# Altium PCB 555_PCB.PcbDoc
Units mm, origin at the board's own origin, x right, y up, seen from the top; angles counter-clockwise.
Board outline 100 x 100 mm, 2 copper layers (Top Layer, Bottom Layer); 7 components, 7 nets, 20 pads, 0 vias.
Unrouted connection lines stored in the file: 9.
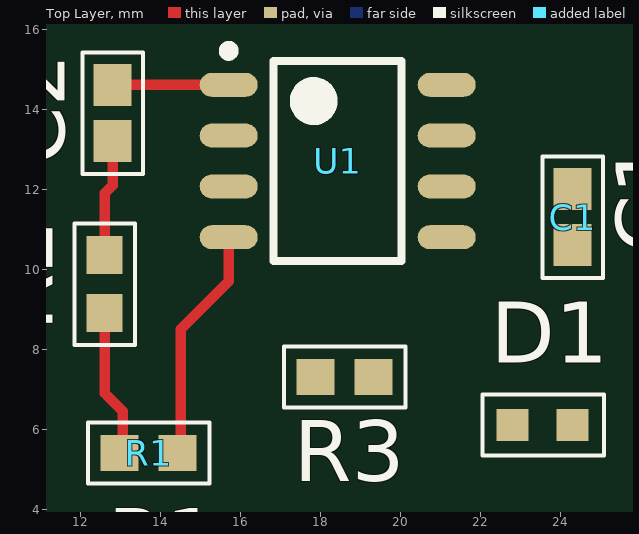
[diagram p0: Top Layer view]
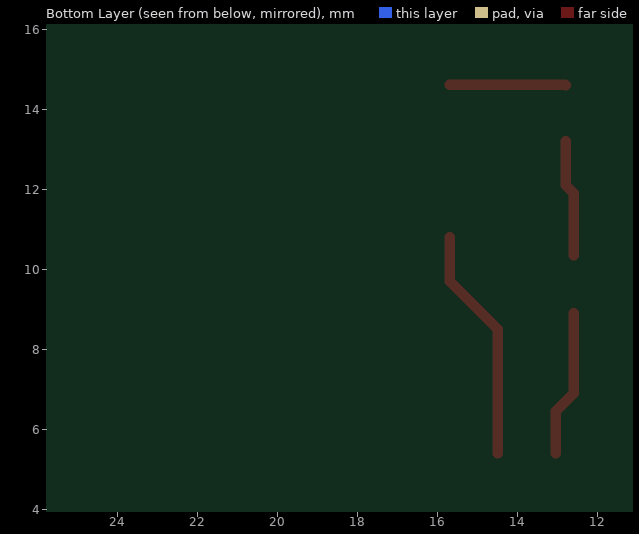
[diagram p1: Bottom Layer view, seen from below]

## Layer stack, top to bottom
Top Solder: solder mask 0.0102, Solder Resist, Dk 3.5
Top Layer: signal copper 0.0356
Dielectric 1: dielectric 0.32, FR-4, Dk 4.8
Bottom Layer: signal copper 0.0356
Bottom Solder: solder mask 0.0102, Solder Resist, Dk 3.5

## Board outline
0,0 100,0 100,100 0,100

## Design rules (kind name [scope] priority, off if disabled: settings)
Clearance [All] p1: gap=0.254 ignorepadtopadclearanceinfootprint=FALSE except(0: Arc-Hole Track-Hole SMDPad-Hole THPad-Hole Via-Hole Fill-Hole Poly-Hole Region-Hole Text-Hole)
PolygonConnect [All] p1: connectstyle=Relief reliefconductorwidth=0.254 reliefentries=4 polygonreliefangle="90 Angle" airgapwidth=0.254
RoutingVias [All] p1: holewidth=0.711 width=1.27 viastyle="Through Hole" minholewidth=0.711 minwidth=1.27 maxholewidth=0.711 maxwidth=1.27
SolderMaskExpansion [All] p1: expansion=0.102
Width [All] p1: maxlimit=1 minlimit=0.254 preferedwidth=0.254 minimp=50.000000 maximp=50.000000 favimp=50.000000
30 further rules are at their usual default settings.

## Components (designator, comment, footprint, x,y, rotation, side; value= is the part's Value field where it differs from the comment)
C1 "10nF" C0603 24.3,11.3 r90 top
C2 "10uF" C0603 12.8,13.9 r90 top
D1 "Green" LED_0603 22.8,6.1 r0 top
R1 "1k" R0603 13.7,5.4 r0 top
R2 "10k" R0603 12.6,9.625 r270 top
R3 "1k" R0603 18.6,7.3 r0 top
U1 "NE555S-13" SOIC8 18.425,12.705 r0 top

## Footprints (in the part's own frame and the unit in brackets; to place one, negate y for a bottom-side part, rotate by r counter-clockwise, add the part's x,y. Pads: shape width x height; smd on the part's side, far side on the other; paste and mask are expansions set on the pad)
C0603 [mm] "Chip Resistor, 2-Leads, Body 1.60x0.80mm, IPC Medium Density"
  rect 1.05x0.95 smd: 1(-0.7,0) 2(0.7,0)
  silkscreen extent -1.52,-0.76 1.52,0.76, body extent -0.87,-0.48 0.87,0.48, height 0.95
LED_0603 [mm]
  rect 0.8x0.8 smd: 1(0,0) 2(1.5,0)
  silkscreen extent -0.76,-0.76 2.29,0.76
R0603 [mm] "Chip Resistor, 2-Leads, Body 1.60x0.80mm, IPC Medium Density"
  rect 0.95x0.9 smd: 1(-0.725,0) 2(0.725,0)
  silkscreen extent -1.52,-0.76 1.52,0.76, body extent -0.85,-0.45 0.85,0.45, height 0.55
SOIC8 [mm] "SOIC, 8-Leads, Body 4.92x3.90mm, Pitch 1.27mm, IPC Medium Density"
  oval 1.45x0.6 smd: 1(-2.725,1.905) 2(-2.725,0.635) 3(-2.725,-0.635) 4(-2.725,-1.905) 5(2.725,-1.905) 6(2.725,-0.635) 7(2.725,0.635) 8(2.725,1.905)
  silkscreen extent -2.85,-2.5 1.6,2.88, body extent -3,-2.5 3,2.5, height 1.75

## Part data
C1: library part CC0603KRX7R6BB103, "Cap Ceramic 0.01uF 10V X7R 10% SMD 0603 125C Paper T/R", Case/Package=0603, Dielectric=X7R, Manufacturer=Yageo, Max Operating Temperature=125°C, Min Operating Temperature=-55°C, Supplier Part Number 1=603-CC603KRX7R6BB103, Tolerance=10%, Voltage Rating=10V, Capacitance=10nF, ComponentLink1Description=http://www.yageo.com/documents/recent/UPY-GPHC_X7R_6.3V-to-50V_8.pdf, ComponentLink1URL=http://www.yageo.com/documents/recent/UPY-GPHC_X7R_6.3V-to-50V_8.pdf, Composition=Ceramic, Depth=0.8mm, Halogen Free="Halogen Free", Height=0.8mm, Lead Free="Lead Free", Length=0.063inch, Manufacturer Part Number=CC0603KRX7R6BB103, Mount="Surface Mount", Packaging="Tape and Reel", Pricing 1="1=0.1, 10=0.039, 50=0.039, 100=0.018, 1000=0.014, 10000=0.01 (USD)", Radiation Hardening=No, Stock 1=25849, Supplier 1=Mouser, Thickness=0.035inch, Voltage Rating (DC)=10V, Width=0.031inch
C2: library part GRM188R61A106KE69D, "Cap Ceramic 10uF 10V X5R 10% SMD 0603 85C Paper T/R", Case/Package=0603, Case Code (Metric)=1608, Dielectric=X5R, Manufacturer=Murata, Max Operating Temperature=85°C, Min Operating Temperature=-55°C, Supplier Part Number 1=81-GRM188R61A106KE9D, Tolerance=10%, Voltage=10V, Capacitance=10uF, Case Code (Imperial)=0603, Depth=0.8mm, Height=0.8mm, Lead Free="Lead Free", Length=1.6mm, Manufacturer Part Number=GRM188R61A106KE69D, Mount="Surface Mount", Packaging="Tape and Reel", Pricing 1="1=0.26, 10=0.17, 50=0.17, 100=0.086, 1000=0.052, 10000=0.04 (USD)", REACH SVHC="No SVHC", Stock 1=423419, Supplier 1=Mouser, Thickness=0.037inch, Voltage Rating=10V, Voltage Rating (DC)=10V, Width=0.031inch
D1: library part LTST-C190GKT, "LED GREEN CLEAR 0603 SMD", Case/Package=0603, Case Code (Metric)=1608, Current=1A, Forward Current=30mA, Forward Voltage=2.1V, Lens Color=Clear,Colorless, Manufacturer="Vishay Lite-On", Max Operating Temperature=85°C, Min Operating Temperature=-55°C, Package Quantity=1, Power Dissipation=100mW, Reverse Voltage=5V, Supplier Part Number 1=160-1183-6-ND, Test Current=10mA, Voltage=2V, Case Code (Imperial)=0603, Color=Green, ComponentLink1Description=http://uk.rs-online.com/webdocs/0dc0/0900766b80dc02a6.pdf, ComponentLink1URL=http://uk.rs-online.com/webdocs/0dc0/0900766b80dc02a6.pdf, ComponentLink2Description=https://media.digikey.com/pdf/Data%20Sheets/Lite-On%20PDFs/LTST-C190GKT.pdf, ComponentLink2URL=https://media.digikey.com/pdf/Data%20Sheets/Lite-On%20PDFs/LTST-C190GKT.pdf, ComponentLink3Description=http://www1.futureelectronics.com/doc/LITE%20ON/LITE-ON%20LTST-C190GKT.pdf, ComponentLink3URL=http://www1.futureelectronics.com/doc/LITE%20ON/LITE-ON%20LTST-C190GKT.pdf, Depth=0.8mm, Dominant Wavelength=569nm, Height=0.8mm, Illumination Color=Green, Lead Free="Lead Free", Length=1.6mm, Lens Style=Clear,Colorless,Diffused,Rectangular, Lens Transparency=Clear, Luminous Intensity=6mcd, Manufacturer Part Number=LTST-C190GKT, Mount="Surface Mount", Number of Elements=1, Number of LEDs=1, Number of Pins=2, Packaging="Tape and Reel", Power Rating=100mW, Pricing 1="1=0.27, 10=0.196, 25=0.1448, 100=0.1034, 250=0.07032, 500=0.06204, 1000=0.0486 (USD)", Radiation Hardening=No, Stock 1=2254042, Supplier 1=Digi-Key, Viewing Angle=130°, Wavelength=565nm, Width=0.8mm
R1 R3: library part ESR03EZPJ102, "RES SMD 1K OHM 5% 1/4W 0603", Case/Package=0603, Case Code (Metric)=1608, Manufacturer=Rohm, Max Operating Temperature=155°C, Max Power Dissipation=250mW, Min Operating Temperature=-55°C, Package Quantity=1, Resistance=1kR, Supplier Part Number 1=2103938, Temperature Coefficient=200ppm/°C, Tolerance=5%, Case Code (Imperial)=0603, ComponentLink1Description=https://www.rohm.com/datasheet/ESR01MZPF/esr-e, ComponentLink1URL=https://www.rohm.com/datasheet/ESR01MZPF/esr-e, Composition="Thick Film", Features="Automotive AEC-Q200", Height=0.022inch, Lead Free="Lead Free", Length=0.063inch, Manufacturer Part Number=ESR03EZPJ102, Number of Terminations=2, Packaging="Tape and Reel", Stock 1=0, Supplier 1="Future Electronics", Width=0.031inch
R2: library part RR0816P-103-D, "RES SMD 10K OHM 0.5% 1/16W 0816", Case/Package=0603, Case Code (Metric)=1608, Manufacturer=Susumu, Max Operating Temperature=125°C, Max Power Dissipation=63mW, Min Operating Temperature=-55°C, Package Quantity=1, Resistance=10kR, Temperature Coefficient=25ppm/°C, Tolerance=0.5%, Voltage Rating=75V, Case Code (Imperial)=0603, ComponentLink1Description=http://documents.rs-components.com/techlib://itc_doclist_GB.htm?stockno=3915321, ComponentLink1URL=http://documents.rs-components.com/techlib://itc_doclist_GB.htm?stockno=3915321, ComponentLink2Description=http://www.susumu.co.jp/common/pdf/n_catalog_partition05_en.pdf, ComponentLink2URL=http://www.susumu.co.jp/common/pdf/n_catalog_partition05_en.pdf, Composition="Thin Film", Depth=0.8mm, Height=0.4mm, Lead Free="Lead Free", Length=1.6mm, Manufacturer Part Number=RR0816P-103-D, Number of Pins=2, Number of Terminations=2, Packaging="Tape and Reel", Power Rating=63mW, Pricing 1="1=0.0837, 10=0.0471, 25=0.0466, 50=0.0459, 100=0.0275, 250=0.0181, 500=0.0179, 1000=0.0177, 3000=0.0166, 6000=0.0155, 15000=0.0145, 30000=0.0134, 75000=0.0123 (USD)", REACH SVHC=Unknown, Stock 1=3511, Supplier 1=Arrow, Supplier Part Number 1=RR0816P-103-D, Termination=SMD/SMT, Voltage Rating (DC)=75V, Weight=7.1E-05oz, Width=0.8mm
U1: "555 Type, Timer/Oscillator (Single) IC 500kHz 8-SOIC (0.154\", 3.90mm Width)", Case/Package=SO, Frequency=500kHz, High Level Output Current=-200mA, Low Level Output Current=200mA, Manufacturer=Diodes, Max Operating Temperature=70°C, Max Supply Voltage=16V, Min Operating Temperature=0°C, Min Supply Voltage=4.5V, Operating Supply Current=13mA, Package Quantity=2500, Quiescent Current=15mA, Supplier Part Number 1=NE555S-13DIDKR-ND, ComponentLink1Description=https://www.diodes.com/assets/Datasheets/NE555_SA555_NA555.pdf, ComponentLink1URL=https://www.diodes.com/assets/Datasheets/NE555_SA555_NA555.pdf, Contact Plating=Matte,Tin, Height=1.5mm, Lead Free="Lead Free", Length=4.95mm, Manufacturer Part Number=NE555S-13, Mount="Surface Mount", Number of Pins=8, Number of Timers/Counters=1, Packaging="Tape and Reel", Pricing 1="1=0.37, 10=0.303, 100=0.206, 500=0.15452, 1000=0.11588 (USD)", Radiation Hardening=No, REACH SVHC="No SVHC", Stock 1=3594, Supplier 1=Digi-Key, Weight=0.01787oz, Width=3.95mm

## Nets (pads, with @x,y where several pads share a name; then routed paths per layer and width w, separated by ;. In a path a pad name is that pad's centre, name@x,y a point inside that pad or via, vN(x,y) a via of type N, cw(c..) or ccw(c..) an arc to the next point about the centre after c; other vN are vias at no path point)
+5V: R1.2 U1.4 U1.8 | length 5.9
  Top Layer w0.254: R1.2@14.5,5.4 14.5,8.5 15.7,9.7 U1.4
COMPARATOR: C1.1 U1.5
DISCHARGE: R1.1 R2.2 U1.7 | length 3.7
  Top Layer w0.254: R2.2 12.6,6.9 13.05,6.45 R1.1@13.05,5.4
GND: C1.2 C2.2 D1.2 U1.1 | length 2.9
  Top Layer w0.254: C2.2 12.81,14.61 U1.1
LED_DRIVE: D1.1 R3.2
OUTPUT: R3.1 U1.3
TRIGGER: C2.1 R2.1 U1.2 U1.6 | length 2.9
  Top Layer w0.254: R2.1 12.6,11.9 12.8,12.1 C2.1